# EAGLE board programmerDual (EAGLE 9.0.1)
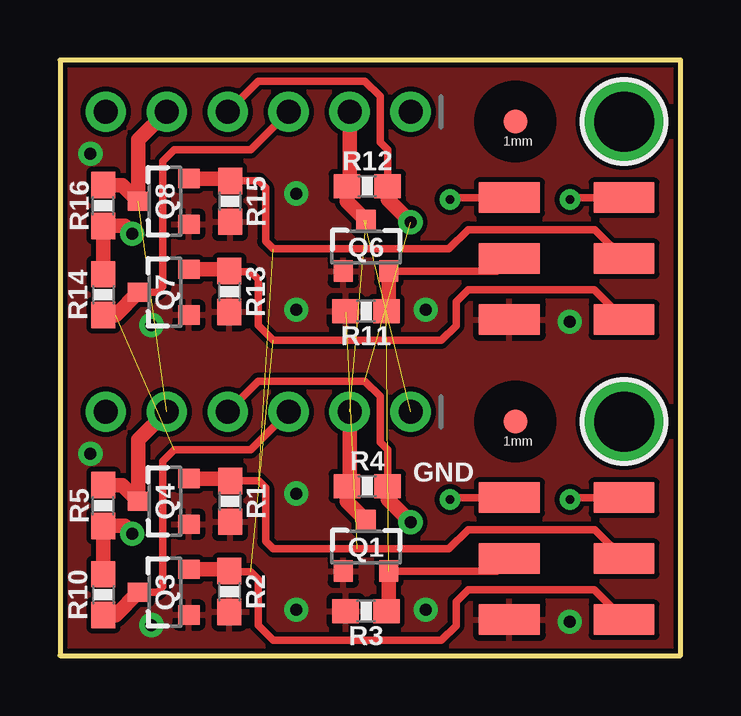
[diagram p0: board, top side]
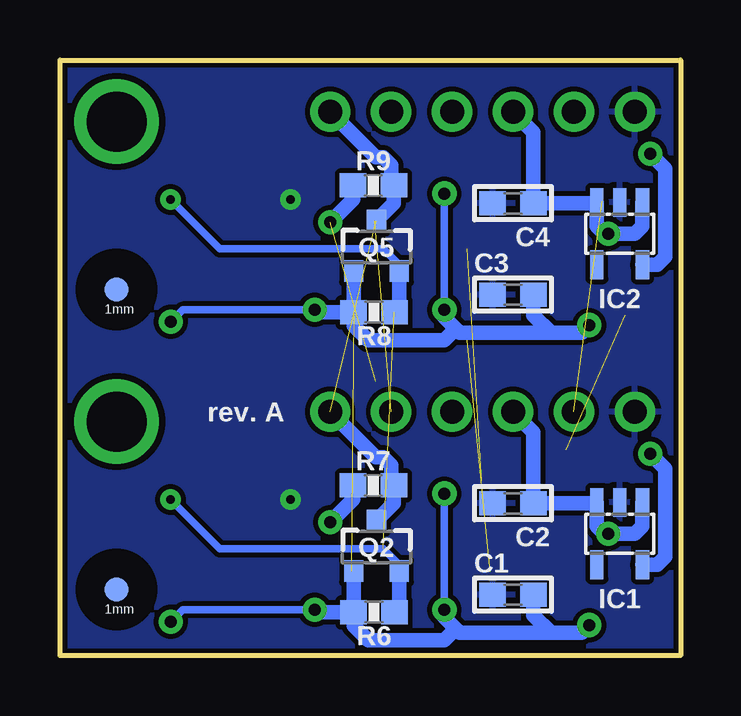
[diagram p1: board, bottom side, seen from below]

Size 25.86 x 24.82 mm. Coordinates in mm from the lower left corner, seen from the top.
Outline: 0,0 25.86,0 25.86,24.82 0,24.82 0,0
Copper layers (1*16): Top 0.035mm / dielectric 1.5mm / Bottom 0.035mm
Design rules "SparkFun *": minimum track width 7mil, minimum drill 15mil, track to track 8mil, track to pad 8mil, pad to pad 8mil, via to via 8mil, smd to smd 8mil, copper to edge 8mil, drill to drill 8mil, minimum pad ring 12mil, minimum via ring 10mil, stop-mask expansion 4mil, vias tented up to drill 20mil, thermal gap 10mil

## Footprints (pad centres in the part's own frame; a part is rotated, then mirrored left to right if it is on the bottom)
0603 = smd 1.1 x 1: 1 -0.85,0; 2 0.85,0
FIDUCIAL-1X2.5 = smd 1 x 1: 1 0,0
SOT23-5L = smd 0.55 x 1.2: 1 -0.95,-1.3; 2 0,-1.3; 3 0.95,-1.3; 4 0.95,1.3; 5 -0.95,1.3
1X06_ROUND = drill 1 pad 1.676: 1 -6.35,0; 2 -3.81,0; 3 -1.27,0; 4 1.27,0; 5 3.81,0; 6 6.35,0
SMD1,27-2,54 = smd 1.27 x 2.54: 1 0,0
SOT23-3 = smd 0.8 x 0.9: 1 -0.95,-1; 2 0.95,-1; 3 0,1.1
0603-RES = smd 1.1 x 1: 1 -0.85,0; 2 0.85,0
MOUNTINGHOLE_2.5_PLATED = drill 2.5 pad 3.2: P$1 0,0

## Placement (x,y rotation side)
C1  10u  [0603]  6.99,2.54 180 bottom
C2  10u  [0603]  6.99,6.35 180 bottom
C3  10u  [0603]  6.99,15.04 180 bottom
C4  10u  [0603]  6.99,18.85 180 bottom
FID1  FIDUCIAL1X2.5  [FIDUCIAL-1X2.5]  18.97,9.75 0 top
FID2  FIDUCIAL1X2.5  [FIDUCIAL-1X2.5]  23.5,2.75 0 bottom
FID3  FIDUCIAL1X2.5  [FIDUCIAL-1X2.5]  18.97,22.25 0 top
FID4  FIDUCIAL1X2.5  [FIDUCIAL-1X2.5]  23.5,15.25 0 bottom
IC1  MIC5225-3.3v  [SOT23-5L]  2.54,5.08 180 bottom
IC2  MIC5225-3.3v  [SOT23-5L]  2.54,17.58 180 bottom
JP1  [1X06_ROUND]  8.26,10.16 180 top
JP2  [1X06_ROUND]  8.26,22.66 180 top
PAD1  WIREPADSMD1,27-254  [SMD1,27-2,54]  18.72,1.5 90 top
PAD2  WIREPADSMD1,27-254  [SMD1,27-2,54]  23.5,1.5 90 top
PAD3  WIREPADSMD1,27-254  [SMD1,27-2,54]  18.72,4.04 90 top
PAD4  WIREPADSMD1,27-254  [SMD1,27-2,54]  23.5,4.04 90 top
PAD5  WIREPADSMD1,27-254  [SMD1,27-2,54]  18.72,6.58 90 top
PAD6  WIREPADSMD1,27-254  [SMD1,27-2,54]  23.5,6.58 90 top
PAD7  WIREPADSMD1,27-254  [SMD1,27-2,54]  18.72,14 90 top
PAD8  WIREPADSMD1,27-254  [SMD1,27-2,54]  23.5,14 90 top
PAD9  WIREPADSMD1,27-254  [SMD1,27-2,54]  18.72,16.54 90 top
PAD10  WIREPADSMD1,27-254  [SMD1,27-2,54]  23.5,16.54 90 top
PAD11  WIREPADSMD1,27-254  [SMD1,27-2,54]  18.72,19.08 90 top
PAD12  WIREPADSMD1,27-254  [SMD1,27-2,54]  23.5,19.08 90 top
Q1  BSS138  [SOT23-3]  12.75,4.52 0 top
Q2  BSS138  [SOT23-3]  12.67,4.52 0 bottom
Q3  BSS138  [SOT23-3]  4.37,2.64 90 top
Q4  BSS138  [SOT23-3]  4.37,6.43 90 top
Q5  BSS138  [SOT23-3]  12.67,17.02 0 bottom
Q6  BSS138  [SOT23-3]  12.75,17.02 0 top
Q7  BSS138  [SOT23-3]  4.37,15.14 90 top
Q8  BSS138  [SOT23-3]  4.37,18.93 90 top
R1  10K  [0603-RES]  7.09,6.43 90 top
R2  10K  [0603-RES]  7.06,2.67 90 top
R3  10K  [0603-RES]  12.75,1.85 0 top
R4  10K  [0603-RES]  12.8,7.06 180 top
R5  10K  [0603-RES]  1.8,6.25 90 top
R6  10K  [0603-RES]  12.78,1.8 0 bottom
R7  10K  [0603-RES]  12.8,7.09 0 bottom
R8  10K  [0603-RES]  12.78,14.3 0 bottom
R9  10K  [0603-RES]  12.8,19.59 0 bottom
R10  10K  [0603-RES]  1.8,2.54 270 top
R11  10K  [0603-RES]  12.75,14.35 0 top
R12  10K  [0603-RES]  12.8,19.56 180 top
R13  10K  [0603-RES]  7.06,15.17 90 top
R14  10K  [0603-RES]  1.8,15.04 270 top
R15  10K  [0603-RES]  7.09,18.93 90 top
R16  10K  [0603-RES]  1.8,18.75 90 top
U$1  MOUNTINGHOLE2.5  [MOUNTINGHOLE_2.5_PLATED]  23.5,9.75 0 top
U$2  MOUNTINGHOLE2.5  [MOUNTINGHOLE_2.5_PLATED]  23.5,22.25 0 top

## Library data of the parts
C1-C4 JP1 JP2 U$1 U$2 = microbuilder
FID1-FID4 = microbuilder; BOM: EXCLUDE
IC1 IC2 = adafruit
PAD1-PAD12 = wirepad
Q1-Q8 R1-R16 = SparkFun

## Nets
+3V3: C1.1 C3.1 IC1.5 IC2.5 PAD1.1 PAD7.1 Q1.1 Q2.1 Q3.1 Q4.1 Q5.1 Q6.1 Q7.1 Q8.1 R1.1 R2.1 R3.1 R6.1 R8.1 R11.1 R13.1 R15.1
+5V0: C2.1 C4.1 IC1.1 IC1.3 IC2.1 IC2.3 JP1.4 JP2.4 R4.1 R5.1 R7.1 R9.1 R10.1 R12.1 R14.1 R16.1
CLK_3V3: PAD4.1 PAD10.1 Q4.2 Q8.2 R1.2 R15.2
CLK_5V0: JP1.5 JP2.5 Q4.3 Q8.3 R5.2 R16.2
GND: C1.2 C2.2 C3.2 C4.2 IC1.2 IC2.2 JP1.6 JP2.6 PAD5.1 PAD11.1
MISO_3V3: PAD2.1 PAD8.1 Q3.2 Q7.2 R2.2 R13.2
MISO_5V0: JP1.3 JP2.3 Q3.3 Q7.3 R10.2 R14.2
MOSI_3V3: PAD3.1 PAD9.1 Q1.2 Q6.2 R3.2 R11.2
MOSI_5V0: JP1.2 JP2.2 Q1.3 Q6.3 R4.2 R12.2
RST_3V3: PAD6.1 PAD12.1 Q2.2 Q5.2 R6.2 R8.2
RST_5V0: JP1.1 JP2.1 Q2.3 Q5.3 R7.2 R9.2

## Tracks (layer width: path | path; a pad name or v marks a point on that pad's centre or on a via)
+3V3  (via drill 0.5)
  Bottom 0.254: 13.86,3.52 Q2.1 | 13.86,16.02 Q5.1
  Bottom 0.305: v9.84,6.75 v9.84,1.91 | v15.24,1.91 20.74,1.91 v21.24,1.41 | v9.84,19.25 v9.84,14.4 | v15.24,14.4 20.74,14.4 v21.24,13.9
  Bottom 0.61: IC1.5 0.98,3.78 0.64,4.13 0.64,7.78 v1.27,8.41 | Q2.1 R6.1 | R6.1 13.63,1.24 13.02,0.64 9.84,0.64 9.37,1.11 | R6.1 15.14,1.8 v15.24,1.91 | v9.84,1.91 9.84,1.59 9.37,1.11 | 9.37,1.11 9.21,0.95 5.4,0.95 | 5.4,0.95 4.13,0.95 v3.81,1.27 | C1.1 6.13,1.69 5.4,0.95 | IC2.5 0.98,16.28 0.64,16.63 0.64,20.28 v1.27,20.91 | Q5.1 R8.1 | R8.1 13.63,13.74 13.02,13.13 9.84,13.13 9.37,13.61 | R8.1 15.14,14.3 v15.24,14.4 | v9.84,14.4 9.84,14.09 9.37,13.61 | 9.37,13.61 9.21,13.45 5.4,13.45 | 5.4,13.45 4.13,13.45 v3.81,13.77 | C3.1 6.13,14.19 5.4,13.45
  pour Top: 0,24.82 25.86,24.82 25.86,0 0,0
+5V0  (via drill 0.5)  (1 unrouted)
  Top 0.305: R4.1 13.65,8.57 13.34,8.89 13.34,10.79 12.7,11.43 8.26,11.43 JP1.4 | R12.1 13.65,21.07 13.34,21.39 13.34,23.3 12.7,23.93 8.26,23.93 JP2.4
  Top 0.61: R10.1 R5.1 2.7,5.4 v3.02,5.08 | R4.1 13.65,6.51 v14.61,5.56 | R14.1 R16.1 2.7,17.9 v3.02,17.58 | R12.1 13.65,19.01 v14.61,18.06
  Bottom 0.61: JP1.4 6.13,9.31 C2.1 3.52,6.35 IC1.3 3.49,5.39 3.17,5.08 v3.02,5.08 1.91,5.08 1.59,5.39 IC1.1 | v14.61,5.56 13.65,6.51 R7.1 | JP2.4 6.13,21.81 C4.1 3.52,18.85 IC2.3 3.49,17.89 3.17,17.58 v3.02,17.58 1.91,17.58 1.59,17.89 IC2.1 | v14.61,18.06 13.65,19.01 R9.1
CLK_3V3  (1 unrouted)
  Top 0.254: R1.2 6.93,7.12 6.68,7.38 | R15.2 6.93,19.62 6.68,19.88
  Top 0.305: R1.2 8.28,7.28 8.57,6.99 8.57,4.76 8.89,4.45 16.2,4.45 17,5.25 22.29,5.25 PAD4.1 | R15.2 8.28,19.78 8.57,19.48 8.57,17.26 8.89,16.95 16.2,16.95 17,17.75 22.29,17.75 PAD10.1
  Top 0.61: Q4.2 6.99,7.38 R1.2 | Q8.2 6.99,19.88 R15.2
CLK_5V0  (1 unrouted)
  Top 0.61: R5.2 2.6,7.1 Q4.3 3.27,8.98 JP1.5 | R16.2 2.6,19.6 Q8.3 3.27,21.48 JP2.5
GND  (via drill 0.35)
  Top 0.305: PAD5.1 16.33,6.58 v16.25,6.5 | PAD11.1 16.33,19.08 v16.25,19
  pour Bottom: 0,24.82 25.86,24.82 25.86,0 0,0
MISO_3V3  (1 unrouted)
  Top 0.254: Q3.2 5.44,3.52 | Q7.2 5.44,16.02
  Top 0.305: R2.2 7.09,3.49 7.94,3.49 8.26,3.17 8.26,1.27 8.89,0.64 15.88,0.64 16.5,1.25 16.5,2.25 17,2.75 22.25,2.75 PAD2.1 | R13.2 7.09,15.99 7.94,15.99 8.26,15.68 8.26,13.77 8.89,13.13 15.88,13.13 16.5,13.75 16.5,14.75 17,15.25 22.25,15.25 PAD8.1
  Top 0.61: Q3.2 6.99,3.59 R2.2 | Q7.2 6.99,16.09 R13.2
MISO_5V0  (1 unrouted)
  Top 0.305: Q3.3 4.07,2.64 4.29,2.86 4.29,8.1 4.76,8.57 7.94,8.57 JP1.3 | Q7.3 4.07,15.14 4.29,15.36 4.29,20.6 4.76,21.07 7.94,21.07 JP2.3
  Top 0.61: R10.2 2.32,1.69 Q3.3 | R14.2 2.32,14.19 Q7.3
MOSI_3V3  (1 unrouted)
  Top 0.305: PAD3.1 18.2,3.52 Q1.2 | PAD9.1 18.2,16.02 Q6.2
  Top 0.61: Q1.2 13.7,1.95 R3.2 | Q6.2 13.7,14.45 R11.2
MOSI_5V0  (1 unrouted)
  Top 0.61: Q1.3 11.95,6.42 R4.2 12.06,7.17 JP1.2 | Q6.3 11.95,18.92 R12.2 12.06,19.68 JP2.2
RST_3V3  (via drill 0.35)  (1 unrouted)
  Top 0.305: PAD6.1 21.33,6.58 v21.25,6.5 | PAD12.1 21.33,19.08 v21.25,19
  Bottom 0.305: Q2.2 11.72,3.79 12.38,4.45 19.2,4.45 v21.25,6.5 | Q5.2 11.72,16.29 12.38,16.95 19.2,16.95 v21.25,19
  Bottom 0.61: Q2.2 11.72,2 R6.2 | Q5.2 11.72,14.51 R8.2
RST_5V0  (1 unrouted)
  Bottom 0.254: 12.06,7.2 R7.2 | 12.06,19.7 R9.2
  Bottom 0.61: Q2.3 11.95,6.34 R7.2 | 12.06,7.2 12.06,7.94 12.38,8.26 12.7,8.26 JP1.1 | Q5.3 11.95,18.84 R9.2 | 12.06,19.7 12.06,20.44 12.38,20.75 12.7,20.75 JP2.1

## Text on the board
tNames: GND
bNames: rev. A